# Altium PCB KUOZHAN.PCBDOC (part 6 of 21)
Units mm, origin at the board's own origin, x right, y up, seen from the top; angles counter-clockwise.
Board outline 165.51 x 116.38 mm, 2 copper layers (Top Layer, Bottom Layer); 171 components, 245 nets, 894 pads, 298 vias.
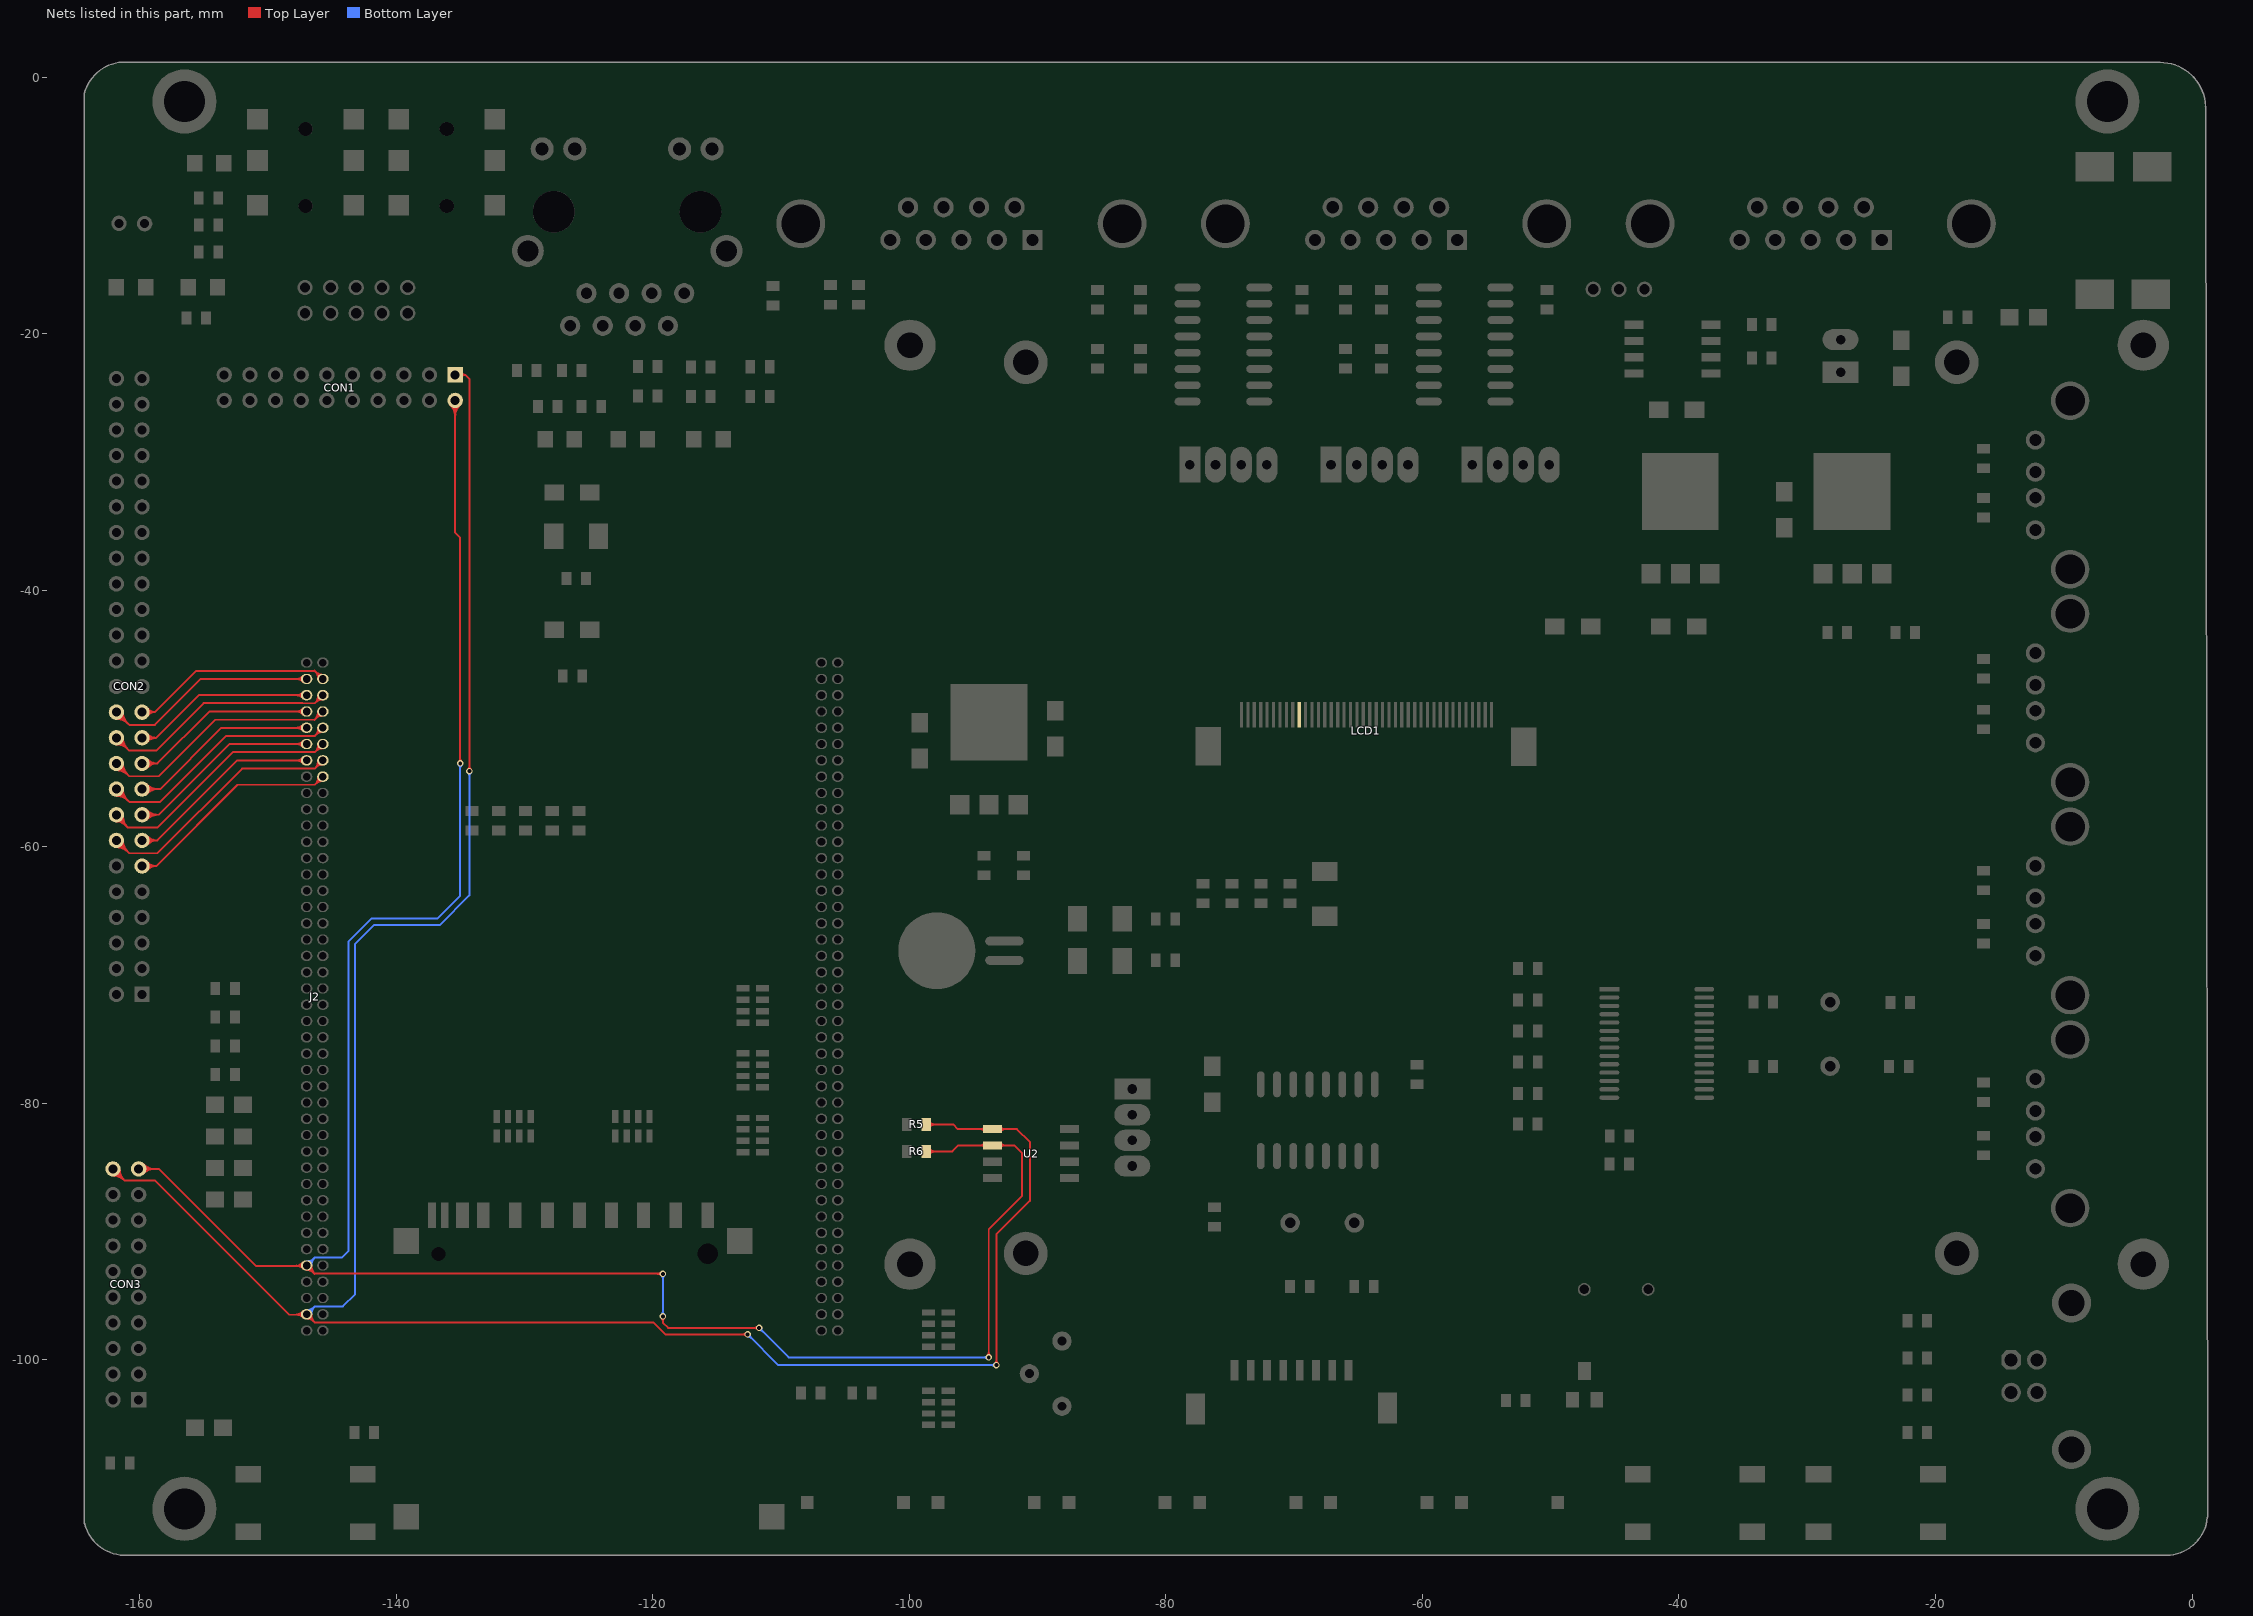
[diagram p6: the nets of this part, all layers, seen from the top]

## Via types
v1: diameter 0.5, hole 0.3, Top Layer to Bottom Layer, 272 vias
v2: diameter 0.6, hole 0.3, Top Layer to Bottom Layer, 24 vias
v3: diameter 0.9, hole 0.9, Top Layer to Bottom Layer, 2 vias

## Nets (pads, with @x,y where several pads share a name; then routed paths per layer and width w, separated by ;. In a path a pad name is that pad's centre, name@x,y a point inside that pad or via, vN(x,y) a via of type N, cw(c..) or ccw(c..) an arc to the next point about the centre after c; other vN are vias at no path point) (continued)
I2CSCL: CON1.2 CON3.19 J2.75 R6.2 U2.6 | length 291.6
  Top Layer w0.15: CON3.19@-160.067,-85.106 -158.494,-85.106 -150.939,-92.661 -146.973,-92.661 -146.348,-93.286 ; J2.75@-146.973,-92.629 -146.328,-93.274 -119.212,-93.274 v1(-119.2,-93.286) ; CON1.2@-135.394,-25.203 -135.394,-35.506 -135,-35.9 v1(-135,-53.5) ; v1@-135.088,-53.412 ccw(c-135.302,-53.198) -135,-53.198 ccw(c-134.698,-53.198) v1@-134.912,-53.412 ; v1@-119.288,-96.688 cw(c-119.502,-96.902) -119.2,-96.902 cw(c-118.898,-96.902) v1@-119.112,-96.688 ; v1@-119.288,-93.374 ccw(c-119.502,-93.588) -119.502,-93.286 ccw(c-119.502,-92.984) v1@-119.288,-93.198 ; v1(-119.2,-96.6) -119.2,-97.1 -118.8,-97.5 v1(-111.7,-97.5) ; v1@-111.788,-97.588 ccw(c-112.002,-97.802) -112.002,-97.5 ccw(c-112.002,-97.198) v1@-111.788,-97.412 ; R6.2@-98.663,-83.74 -96.64,-83.74 -96.172,-83.272 U2.6@-93.498,-83.272 -91.828,-83.272 -91.2,-83.9 -91.2,-87.194 -93.8,-89.794 v1(-93.8,-99.8) ; v1@-93.888,-99.712 ccw(c-94.102,-99.498) -93.8,-99.498 ccw(c-93.498,-99.498) v1@-93.712,-99.712 ; CON3.19@-159.802,-85.372 cw(c-159.162,-86.012) -159.162,-85.106 ; CON3.19@-159.802,-85.372 cw(c-159.162,-86.012) -159.162,-85.106 ; CON3.19@-159.802,-85.372 cw(c-159.162,-86.012) -159.162,-85.106 ; CON3.19@-159.802,-85.372 cw(c-159.162,-86.012) -159.162,-85.106 ; CON3.19@-159.802,-85.372 cw(c-159.162,-86.012) -159.162,-85.106 ; CON3.19@-159.802,-84.841 ccw(c-159.162,-84.201) -159.162,-85.106 ; CON3.19@-159.802,-84.841 ccw(c-159.162,-84.201) -159.162,-85.106 ; CON3.19@-159.802,-84.841 ccw(c-159.162,-84.201) -159.162,-85.106 ; CON3.19@-159.802,-84.841 ccw(c-159.162,-84.201) -159.162,-85.106 ; CON3.19@-159.802,-84.841 ccw(c-159.162,-84.201) -159.162,-85.106 ; CON3.19@-159.696,-85.478 cw(c-158.8,-86.374) -158.8,-85.106 ; CON3.19@-159.696,-85.478 cw(c-158.8,-86.374) -158.8,-85.106 ; CON3.19@-159.696,-85.478 cw(c-158.8,-86.374) -158.8,-85.106 ; CON3.19@-159.696,-85.478 cw(c-158.8,-86.374) -158.8,-85.106 ; CON3.19@-159.696,-85.478 cw(c-158.8,-86.374) -158.8,-85.106 ; CON3.19@-159.696,-84.735 ccw(c-158.8,-83.839) -158.8,-85.106 ; CON3.19@-159.696,-84.735 ccw(c-158.8,-83.839) -158.8,-85.106 ; CON3.19@-159.696,-84.735 ccw(c-158.8,-83.839) -158.8,-85.106 ; CON3.19@-159.696,-84.735 ccw(c-158.8,-83.839) -158.8,-85.106 ; CON3.19@-159.696,-84.735 ccw(c-158.8,-83.839) -158.8,-85.106 ; -147.757,-92.661 cw(c-147.757,-93.446) J2.75@-147.203,-92.891 ; -147.757,-92.661 ccw(c-147.757,-91.876) J2.75@-147.203,-92.431 ; -147.757,-92.661 cw(c-147.757,-93.446) J2.75@-147.203,-92.891 ; -147.757,-92.661 ccw(c-147.757,-91.876) J2.75@-147.203,-92.431 ; -147.757,-92.661 cw(c-147.757,-93.446) J2.75@-147.203,-92.891 ; -147.757,-92.661 ccw(c-147.757,-91.876) J2.75@-147.203,-92.431 ; J2.75@-147.395,-92.661 cw(c-147.395,-93.083) J2.75@-147.097,-92.785 ; J2.75@-147.395,-92.661 ccw(c-147.395,-92.238) J2.75@-147.097,-92.537 ; J2.75@-147.395,-92.661 cw(c-147.395,-93.083) J2.75@-147.097,-92.785 ; J2.75@-147.395,-92.661 ccw(c-147.395,-92.238) J2.75@-147.097,-92.537 ; J2.75@-147.395,-92.661 cw(c-147.395,-93.083) J2.75@-147.097,-92.785 ; J2.75@-147.395,-92.661 ccw(c-147.395,-92.238) J2.75@-147.097,-92.537 ; J2.75@-146.973,-92.986 cw(c-146.973,-93.771) -146.418,-93.216 ; J2.75@-146.973,-92.986 cw(c-146.973,-93.771) -146.418,-93.216 ; J2.75@-146.973,-92.986 cw(c-146.973,-93.771) -146.418,-93.216 ; J2.75@-146.973,-92.836 cw(c-146.973,-93.258) -146.674,-92.96 ; J2.75@-146.973,-92.836 cw(c-146.973,-93.258) -146.674,-92.96 ; J2.75@-146.973,-92.836 cw(c-146.973,-93.258) -146.674,-92.96 ; J2.75@-146.923,-92.954 cw(c-146.923,-93.618) -146.453,-93.149 ccw(c-146.923,-93.618) J2.75@-146.923,-92.954 ; J2.75@-146.923,-92.954 cw(c-146.923,-93.542) -146.507,-93.126 ccw(c-146.923,-93.542) J2.75@-146.923,-92.954 ; J2.75@-146.798,-92.661 ccw(c-146.375,-92.661) -146.674,-92.96 ; J2.75@-146.798,-92.661 ccw(c-146.375,-92.661) -146.674,-92.96 ; J2.75@-146.798,-92.661 ccw(c-146.375,-92.661) -146.674,-92.96 ; J2.75@-146.648,-92.661 ccw(c-145.863,-92.661) -146.418,-93.216 ; J2.75@-146.648,-92.661 ccw(c-145.863,-92.661) -146.418,-93.216 ; J2.75@-146.648,-92.661 ccw(c-145.863,-92.661) -146.418,-93.216 ; CON1.2@-135.765,-25.574 cw(c-136.661,-26.47) -135.394,-26.47 ; CON1.2@-135.765,-25.574 cw(c-136.661,-26.47) -135.394,-26.47 ; CON1.2@-135.765,-25.574 cw(c-136.661,-26.47) -135.394,-26.47 ; CON1.2@-135.765,-25.574 cw(c-136.661,-26.47) -135.394,-26.47 ; CON1.2@-135.765,-25.574 cw(c-136.661,-26.47) -135.394,-26.47 ; CON1.2@-135.659,-25.468 cw(c-136.299,-26.108) -135.394,-26.108 ; CON1.2@-135.659,-25.468 cw(c-136.299,-26.108) -135.394,-26.108 ; CON1.2@-135.659,-25.468 cw(c-136.299,-26.108) -135.394,-26.108 ; CON1.2@-135.659,-25.468 cw(c-136.299,-26.108) -135.394,-26.108 ; CON1.2@-135.659,-25.468 cw(c-136.299,-26.108) -135.394,-26.108 ; -135.394,-26.47 cw(c-134.126,-26.47) CON1.2@-135.022,-25.574 ; -135.394,-26.47 cw(c-134.126,-26.47) CON1.2@-135.022,-25.574 ; -135.394,-26.47 cw(c-134.126,-26.47) CON1.2@-135.022,-25.574 ; -135.394,-26.47 cw(c-134.126,-26.47) CON1.2@-135.022,-25.574 ; -135.394,-26.47 cw(c-134.126,-26.47) CON1.2@-135.022,-25.574 ; -135.394,-26.108 cw(c-134.488,-26.108) CON1.2@-135.128,-25.468 ; -135.394,-26.108 cw(c-134.488,-26.108) CON1.2@-135.128,-25.468 ; -135.394,-26.108 cw(c-134.488,-26.108) CON1.2@-135.128,-25.468 ; -135.394,-26.108 cw(c-134.488,-26.108) CON1.2@-135.128,-25.468 ; -135.394,-26.108 cw(c-134.488,-26.108) CON1.2@-135.128,-25.468 ; v1@-135.124,-53.376 ccw(c-135.422,-53.078) -135,-53.078 ; v1@-135.124,-53.376 ccw(c-135.422,-53.078) -135,-53.078 ; v1@-135.124,-53.376 ccw(c-135.422,-53.078) -135,-53.078 ; v1@-135.124,-53.376 ccw(c-135.422,-53.078) -135,-53.078 ; -135,-53.078 ccw(c-134.578,-53.078) v1@-134.876,-53.376 ; -135,-53.078 ccw(c-134.578,-53.078) v1@-134.876,-53.376 ; -135,-53.078 ccw(c-134.578,-53.078) v1@-134.876,-53.376 ; -135,-53.078 ccw(c-134.578,-53.078) v1@-134.876,-53.376 ; -119.622,-93.286 cw(c-119.622,-93.708) v1@-119.324,-93.41 ; -119.622,-93.286 ccw(c-119.622,-92.863) v1@-119.324,-93.162 ; -119.622,-93.286 cw(c-119.622,-93.708) v1@-119.324,-93.41 ; -119.622,-93.286 ccw(c-119.622,-92.863) v1@-119.324,-93.162 ; v1@-119.324,-96.724 cw(c-119.622,-97.022) -119.2,-97.022 ; v1@-119.324,-96.724 cw(c-119.622,-97.022) -119.2,-97.022 ; v1@-119.324,-96.724 cw(c-119.622,-97.022) -119.2,-97.022 ; v1@-119.324,-96.724 cw(c-119.622,-97.022) -119.2,-97.022 ; v1@-119.324,-93.41 ccw(c-119.651,-93.736) -119.651,-93.274 cw(c-119.651,-93.736) v1@-119.324,-93.41 ; v1@-119.324,-93.162 cw(c-119.594,-92.891) -119.594,-93.274 ccw(c-119.594,-92.891) v1@-119.324,-93.162 ; -119.2,-97.022 cw(c-118.778,-97.022) v1@-119.076,-96.724 ; -119.2,-97.022 cw(c-118.778,-97.022) v1@-119.076,-96.724 ; -119.2,-97.022 cw(c-118.778,-97.022) v1@-119.076,-96.724 ; -119.2,-97.022 cw(c-118.778,-97.022) v1@-119.076,-96.724 ; -112.122,-97.5 cw(c-112.122,-97.922) v1@-111.824,-97.624 ; -112.122,-97.5 ccw(c-112.122,-97.078) v1@-111.824,-97.376 ; -112.122,-97.5 cw(c-112.122,-97.922) v1@-111.824,-97.624 ; -112.122,-97.5 ccw(c-112.122,-97.078) v1@-111.824,-97.376 ; -112.122,-97.5 cw(c-112.122,-97.922) v1@-111.824,-97.624 ; -112.122,-97.5 ccw(c-112.122,-97.078) v1@-111.824,-97.376 ; -112.122,-97.5 ccw(c-112.122,-97.078) v1@-111.824,-97.376 ; -112.122,-97.5 cw(c-112.122,-97.922) v1@-111.824,-97.624 ; R6.2@-98.447,-83.957 cw(c-97.925,-84.479) -97.925,-83.74 ; R6.2@-98.447,-83.957 cw(c-97.925,-84.479) -97.925,-83.74 ; R6.2@-98.447,-83.957 cw(c-97.925,-84.479) -97.925,-83.74 ; R6.2@-98.447,-83.957 cw(c-97.925,-84.479) -97.925,-83.74 ; R6.2@-98.447,-83.957 cw(c-97.925,-84.479) -97.925,-83.74 ; R6.2@-98.447,-83.524 ccw(c-97.925,-83.002) -97.925,-83.74 ; R6.2@-98.447,-83.524 ccw(c-97.925,-83.002) -97.925,-83.74 ; R6.2@-98.447,-83.524 ccw(c-97.925,-83.002) -97.925,-83.74 ; R6.2@-98.447,-83.524 ccw(c-97.925,-83.002) -97.925,-83.74 ; R6.2@-98.447,-83.524 ccw(c-97.925,-83.002) -97.925,-83.74 ; -94.516,-83.272 cw(c-94.516,-83.857) U2.6@-94.102,-83.443 ; -94.516,-83.272 ccw(c-94.516,-82.686) U2.6@-94.102,-83.1 ; -94.516,-83.272 cw(c-94.516,-83.857) U2.6@-94.102,-83.443 ; -94.516,-83.272 ccw(c-94.516,-82.686) U2.6@-94.102,-83.1 ; -94.516,-83.272 cw(c-94.516,-83.857) U2.6@-94.102,-83.443 ; -94.516,-83.272 ccw(c-94.516,-82.686) U2.6@-94.102,-83.1 ; -94.516,-83.272 cw(c-94.516,-83.857) U2.6@-94.102,-83.443 ; -94.516,-83.272 ccw(c-94.516,-82.686) U2.6@-94.102,-83.1 ; -94.516,-83.272 ccw(c-94.516,-82.686) U2.6@-94.102,-83.1 ; -94.516,-83.272 cw(c-94.516,-83.857) U2.6@-94.102,-83.443 ; v1@-93.924,-99.676 ccw(c-94.222,-99.378) -93.8,-99.378 ; v1@-93.924,-99.676 ccw(c-94.222,-99.378) -93.8,-99.378 ; v1@-93.924,-99.676 ccw(c-94.222,-99.378) -93.8,-99.378 ; v1@-93.924,-99.676 ccw(c-94.222,-99.378) -93.8,-99.378 ; -93.8,-99.378 ccw(c-93.378,-99.378) v1@-93.676,-99.676 ; -93.8,-99.378 ccw(c-93.378,-99.378) v1@-93.676,-99.676 ; -93.8,-99.378 ccw(c-93.378,-99.378) v1@-93.676,-99.676 ; -93.8,-99.378 ccw(c-93.378,-99.378) v1@-93.676,-99.676 ; U2.6@-92.894,-83.443 cw(c-92.48,-83.857) -92.48,-83.272 ; U2.6@-92.894,-83.443 cw(c-92.48,-83.857) -92.48,-83.272 ; U2.6@-92.894,-83.443 cw(c-92.48,-83.857) -92.48,-83.272 ; U2.6@-92.894,-83.443 cw(c-92.48,-83.857) -92.48,-83.272 ; U2.6@-92.894,-83.443 cw(c-92.48,-83.857) -92.48,-83.272 ; U2.6@-92.894,-83.1 ccw(c-92.48,-82.686) -92.48,-83.272 ; U2.6@-92.894,-83.1 ccw(c-92.48,-82.686) -92.48,-83.272 ; U2.6@-92.894,-83.1 ccw(c-92.48,-82.686) -92.48,-83.272 ; U2.6@-92.894,-83.1 ccw(c-92.48,-82.686) -92.48,-83.272 ; U2.6@-92.894,-83.1 ccw(c-92.48,-82.686) -92.48,-83.272 ; -147.884,-92.661 ccw(c-147.884,-91.768) -147.253,-92.399 cw(c-147.884,-91.768) -147.884,-92.661 ; -147.731,-92.661 cw(c-147.731,-93.338) -147.253,-92.859 ccw(c-147.731,-93.338) -147.731,-92.661 ; -147.522,-92.661 ccw(c-147.522,-92.131) -147.147,-92.506 cw(c-147.522,-92.131) -147.522,-92.661 ; J2.75@-146.749,-92.646 ccw(c-146.284,-92.69) -146.614,-93.02 cw(c-146.284,-92.69) J2.75@-146.749,-92.646 ; J2.75@-146.748,-92.633 ccw(c-146.244,-92.646) -146.6,-93.002 cw(c-146.244,-92.646) J2.75@-146.748,-92.633 ; J2.75@-146.599,-92.66 ccw(c-145.872,-92.729) -146.389,-93.245 cw(c-145.872,-92.729) J2.75@-146.599,-92.66 ; J2.75@-146.598,-92.637 ccw(c-145.761,-92.657) -146.353,-93.249 cw(c-145.761,-92.657) J2.75@-146.598,-92.637
  Bottom Layer w0.15: J2.75@-146.973,-92.661 -146.327,-92.015 ; J2.75@-146.973,-92.629 -146.343,-92 ; v1@-135.088,-53.588 cw(c-135.302,-53.802) -135,-53.802 cw(c-134.698,-53.802) v1@-134.912,-53.588 ; v1(-135,-53.5) -135,-63.8 -136.8,-65.6 -141.935,-65.6 -143.7,-67.365 -143.7,-91.5 -144.105,-91.905 -144.2,-92 -146.343,-92 ; v1@-119.288,-96.512 ccw(c-119.502,-96.298) -119.2,-96.298 ccw(c-118.898,-96.298) v1@-119.112,-96.512 ; v1@-119.288,-93.374 cw(c-119.502,-93.588) -119.2,-93.588 cw(c-118.898,-93.588) v1@-119.112,-93.374 ; v1(-119.2,-96.6) v1(-119.2,-93.286) ; v1@-111.7,-97.625 cw(c-111.7,-97.927) -111.487,-97.713 cw(c-111.273,-97.5) v1@-111.575,-97.5 ; v1(-111.7,-97.5) -109.4,-99.8 v1(-93.8,-99.8) ; v1@-93.888,-99.888 ccw(c-94.102,-100.102) -94.102,-99.8 ccw(c-94.102,-99.498) v1@-93.888,-99.712 ; J2.75@-146.973,-92.486 ccw(c-146.973,-92.063) J2.75@-146.674,-92.362 ; J2.75@-146.973,-92.486 ccw(c-146.973,-92.063) J2.75@-146.674,-92.362 ; J2.75@-146.973,-92.486 ccw(c-146.973,-92.063) J2.75@-146.674,-92.362 ; J2.75@-146.973,-92.336 ccw(c-146.973,-91.551) -146.418,-92.106 ; J2.75@-146.973,-92.336 ccw(c-146.973,-91.551) -146.418,-92.106 ; J2.75@-146.973,-92.336 ccw(c-146.973,-91.551) -146.418,-92.106 ; J2.75@-146.923,-92.304 ccw(c-146.923,-91.564) -146.399,-92.087 cw(c-146.923,-91.564) J2.75@-146.923,-92.304 ; J2.75@-146.923,-92.304 ccw(c-146.923,-91.64) -146.453,-92.11 cw(c-146.923,-91.64) J2.75@-146.923,-92.304 ; J2.75@-146.798,-92.661 cw(c-146.375,-92.661) J2.75@-146.674,-92.362 ; J2.75@-146.798,-92.661 cw(c-146.375,-92.661) J2.75@-146.674,-92.362 ; J2.75@-146.798,-92.661 cw(c-146.375,-92.661) J2.75@-146.674,-92.362 ; J2.75@-146.648,-92.661 cw(c-145.863,-92.661) -146.418,-92.106 ; J2.75@-146.648,-92.661 cw(c-145.863,-92.661) -146.418,-92.106 ; J2.75@-146.648,-92.661 cw(c-145.863,-92.661) -146.418,-92.106 ; -146.344,-92 ccw(c-145.729,-92.614) -146.598,-92.625 cw(c-145.729,-92.614) -146.344,-92 ; v1@-135.124,-53.624 cw(c-135.422,-53.922) -135,-53.922 ; v1@-135.124,-53.624 cw(c-135.422,-53.922) -135,-53.922 ; v1@-135.124,-53.624 cw(c-135.422,-53.922) -135,-53.922 ; v1@-135.124,-53.624 cw(c-135.422,-53.922) -135,-53.922 ; -135,-53.922 cw(c-134.578,-53.922) v1@-134.876,-53.624 ; -135,-53.922 cw(c-134.578,-53.922) v1@-134.876,-53.624 ; -135,-53.922 cw(c-134.578,-53.922) v1@-134.876,-53.624 ; -135,-53.922 cw(c-134.578,-53.922) v1@-134.876,-53.624 ; v1@-119.324,-96.476 ccw(c-119.622,-96.178) -119.2,-96.178 ; v1@-119.324,-96.476 ccw(c-119.622,-96.178) -119.2,-96.178 ; v1@-119.324,-96.476 ccw(c-119.622,-96.178) -119.2,-96.178 ; v1@-119.324,-96.476 ccw(c-119.622,-96.178) -119.2,-96.178 ; v1@-119.324,-93.41 cw(c-119.622,-93.708) -119.2,-93.708 ; v1@-119.324,-93.41 cw(c-119.622,-93.708) -119.2,-93.708 ; v1@-119.324,-93.41 cw(c-119.622,-93.708) -119.2,-93.708 ; v1@-119.324,-93.41 cw(c-119.622,-93.708) -119.2,-93.708 ; -119.2,-96.178 ccw(c-118.778,-96.178) v1@-119.076,-96.476 ; -119.2,-96.178 ccw(c-118.778,-96.178) v1@-119.076,-96.476 ; -119.2,-96.178 ccw(c-118.778,-96.178) v1@-119.076,-96.476 ; -119.2,-96.178 ccw(c-118.778,-96.178) v1@-119.076,-96.476 ; -119.2,-93.708 cw(c-118.778,-93.708) v1@-119.076,-93.41 ; -119.2,-93.708 cw(c-118.778,-93.708) v1@-119.076,-93.41 ; -119.2,-93.708 cw(c-118.778,-93.708) v1@-119.076,-93.41 ; -119.2,-93.708 cw(c-118.778,-93.708) v1@-119.076,-93.41 ; v1@-111.7,-97.675 cw(c-111.7,-98.097) -111.401,-97.799 ; v1@-111.7,-97.675 cw(c-111.7,-98.097) -111.401,-97.799 ; v1@-111.7,-97.675 cw(c-111.7,-98.097) -111.401,-97.799 ; v1@-111.7,-97.675 cw(c-111.7,-98.097) -111.401,-97.799 ; v1@-111.525,-97.5 ccw(c-111.103,-97.5) -111.401,-97.799 ; v1@-111.525,-97.5 ccw(c-111.103,-97.5) -111.401,-97.799 ; v1@-111.525,-97.5 ccw(c-111.103,-97.5) -111.401,-97.799 ; v1@-111.525,-97.5 ccw(c-111.103,-97.5) -111.401,-97.799 ; -94.222,-99.8 cw(c-94.222,-100.222) v1@-93.924,-99.924 ; -94.222,-99.8 ccw(c-94.222,-99.378) v1@-93.924,-99.676 ; -94.222,-99.8 cw(c-94.222,-100.222) v1@-93.924,-99.924 ; -94.222,-99.8 ccw(c-94.222,-99.378) v1@-93.924,-99.676 ; -94.222,-99.8 cw(c-94.222,-100.222) v1@-93.924,-99.924 ; -94.222,-99.8 ccw(c-94.222,-99.378) v1@-93.924,-99.676 ; -94.222,-99.8 ccw(c-94.222,-99.378) v1@-93.924,-99.676 ; -94.222,-99.8 cw(c-94.222,-100.222) v1@-93.924,-99.924 ; J2.75@-146.748,-92.629 cw(c-146.281,-92.629) -146.611,-92.299 ccw(c-146.281,-92.629) J2.75@-146.748,-92.629 ; J2.75@-146.748,-92.627 cw(c-146.226,-92.62) -146.595,-92.252 ccw(c-146.226,-92.62) J2.75@-146.748,-92.627 ; J2.75@-146.598,-92.629 cw(c-145.769,-92.629) -146.355,-92.043 ccw(c-145.769,-92.629) J2.75@-146.598,-92.629
I2CSDA: CON1.1 CON3.20 J2.81 R5.2 U2.5 | length 267.9
  Top Layer w0.15: CON3.20@-162.067,-85.106 -161.174,-86 ; J2.81@-146.973,-96.474 -148.326,-96.474 -158.8,-86 -161.174,-86 ; J2.81@-146.973,-96.439 -146.348,-97.064 -119.936,-97.064 ; CON1.1@-135.394,-23.203 -134.597,-23.203 ; v1@-134.368,-54.012 ccw(c-134.581,-53.798) -134.279,-53.798 ccw(c-133.977,-53.798) v1@-134.191,-54.012 ; v1(-134.279,-54.1) -134.279,-23.521 -134.597,-23.203 ; -119.901,-97.099 -119,-98 v1(-112.6,-98) ; v1@-112.688,-98.088 ccw(c-112.902,-98.302) -112.902,-98 ccw(c-112.902,-97.698) v1@-112.688,-97.912 ; R5.2@-98.663,-81.64 -96.56,-81.64 -96.198,-82.002 U2.5@-93.498,-82.002 -91.598,-82.002 -90.6,-83 -90.6,-87.6 -93.2,-90.2 v1(-93.2,-100.4) ; v1@-93.288,-100.312 ccw(c-93.502,-100.098) -93.2,-100.098 ccw(c-92.898,-100.098) v1@-93.112,-100.312 ; CON3.20@-162.066,-85.631 cw(c-162.064,-86.89) -161.174,-86 ; CON3.20@-162.066,-85.631 cw(c-162.064,-86.89) -161.174,-86 ; CON3.20@-162.066,-85.631 cw(c-162.064,-86.89) -161.174,-86 ; CON3.20@-162.066,-85.631 cw(c-162.064,-86.89) -161.174,-86 ; CON3.20@-162.066,-85.631 cw(c-162.064,-86.89) -161.174,-86 ; CON3.20@-162.067,-85.481 cw(c-162.065,-86.38) -161.429,-85.745 ; CON3.20@-162.067,-85.481 cw(c-162.065,-86.38) -161.429,-85.745 ; CON3.20@-162.067,-85.481 cw(c-162.065,-86.38) -161.429,-85.745 ; CON3.20@-162.067,-85.481 cw(c-162.065,-86.38) -161.429,-85.745 ; CON3.20@-162.067,-85.481 cw(c-162.065,-86.38) -161.429,-85.745 ; CON3.20@-161.692,-85.107 ccw(c-160.794,-85.109) -161.429,-85.745 ; CON3.20@-161.692,-85.107 ccw(c-160.794,-85.109) -161.429,-85.745 ; CON3.20@-161.692,-85.107 ccw(c-160.794,-85.109) -161.429,-85.745 ; CON3.20@-161.692,-85.107 ccw(c-160.794,-85.109) -161.429,-85.745 ; CON3.20@-161.692,-85.107 ccw(c-160.794,-85.109) -161.429,-85.745 ; CON3.20@-161.542,-85.108 ccw(c-160.284,-85.11) -161.174,-86 ; CON3.20@-161.542,-85.108 ccw(c-160.284,-85.11) -161.174,-86 ; CON3.20@-161.542,-85.108 ccw(c-160.284,-85.11) -161.174,-86 ; CON3.20@-161.542,-85.108 ccw(c-160.284,-85.11) -161.174,-86 ; CON3.20@-161.542,-85.108 ccw(c-160.284,-85.11) -161.174,-86 ; -147.757,-96.474 cw(c-147.757,-97.258) J2.81@-147.203,-96.703 ; -147.757,-96.474 ccw(c-147.757,-95.689) J2.81@-147.203,-96.244 ; -147.757,-96.474 cw(c-147.757,-97.258) J2.81@-147.203,-96.703 ; -147.757,-96.474 ccw(c-147.757,-95.689) J2.81@-147.203,-96.244 ; -147.757,-96.474 cw(c-147.757,-97.258) J2.81@-147.203,-96.703 ; -147.757,-96.474 ccw(c-147.757,-95.689) J2.81@-147.203,-96.244 ; J2.81@-147.395,-96.474 cw(c-147.395,-96.896) J2.81@-147.097,-96.597 ; J2.81@-147.395,-96.474 ccw(c-147.395,-96.051) J2.81@-147.097,-96.35 ; J2.81@-147.395,-96.474 cw(c-147.395,-96.896) J2.81@-147.097,-96.597 ; J2.81@-147.395,-96.474 ccw(c-147.395,-96.051) J2.81@-147.097,-96.35 ; J2.81@-147.395,-96.474 cw(c-147.395,-96.896) J2.81@-147.097,-96.597 ; J2.81@-147.395,-96.474 ccw(c-147.395,-96.051) J2.81@-147.097,-96.35 ; J2.81@-146.973,-96.649 cw(c-146.973,-97.071) -146.674,-96.772 ; J2.81@-146.973,-96.649 cw(c-146.973,-97.071) -146.674,-96.772 ; J2.81@-146.973,-96.649 cw(c-146.973,-97.071) -146.674,-96.772 ; J2.81@-146.798,-96.474 ccw(c-146.375,-96.474) -146.674,-96.772 ; J2.81@-146.798,-96.474 ccw(c-146.375,-96.474) -146.674,-96.772 ; J2.81@-146.798,-96.474 ccw(c-146.375,-96.474) -146.674,-96.772 ; CON1.1@-134.911,-23.409 cw(c-134.597,-23.544) -134.597,-23.203 ; CON1.1@-134.911,-23.409 cw(c-134.597,-23.544) -134.597,-23.203 ; CON1.1@-134.911,-23.409 cw(c-134.597,-23.544) -134.597,-23.203 ; CON1.1@-134.911,-23.409 cw(c-134.597,-23.544) -134.597,-23.203 ; CON1.1@-134.911,-23.409 cw(c-134.597,-23.544) -134.597,-23.203 ; CON1.1@-134.911,-22.996 ccw(c-134.597,-22.861) -134.597,-23.203 ; CON1.1@-134.911,-22.996 ccw(c-134.597,-22.861) -134.597,-23.203 ; CON1.1@-134.911,-22.996 ccw(c-134.597,-22.861) -134.597,-23.203 ; CON1.1@-134.911,-22.996 ccw(c-134.597,-22.861) -134.597,-23.203 ; CON1.1@-134.911,-22.996 ccw(c-134.597,-22.861) -134.597,-23.203 ; v1@-134.403,-53.976 ccw(c-134.702,-53.678) -134.279,-53.678 ; v1@-134.403,-53.976 ccw(c-134.702,-53.678) -134.279,-53.678 ; v1@-134.403,-53.976 ccw(c-134.702,-53.678) -134.279,-53.678 ; v1@-134.403,-53.976 ccw(c-134.702,-53.678) -134.279,-53.678 ; -134.279,-53.678 ccw(c-133.857,-53.678) v1@-134.155,-53.976 ; -134.279,-53.678 ccw(c-133.857,-53.678) v1@-134.155,-53.976 ; -134.279,-53.678 ccw(c-133.857,-53.678) v1@-134.155,-53.976 ; -134.279,-53.678 ccw(c-133.857,-53.678) v1@-134.155,-53.976 ; -113.022,-98 cw(c-113.022,-98.422) v1@-112.724,-98.124 ; -113.022,-98 ccw(c-113.022,-97.578) v1@-112.724,-97.876 ; -113.022,-98 cw(c-113.022,-98.422) v1@-112.724,-98.124 ; -113.022,-98 ccw(c-113.022,-97.578) v1@-112.724,-97.876 ; -113.022,-98 cw(c-113.022,-98.422) v1@-112.724,-98.124 ; -113.022,-98 ccw(c-113.022,-97.578) v1@-112.724,-97.876 ; -113.022,-98 ccw(c-113.022,-97.578) v1@-112.724,-97.876 ; -113.022,-98 cw(c-113.022,-98.422) v1@-112.724,-98.124 ; R5.2@-98.447,-81.857 cw(c-97.925,-82.379) -97.925,-81.64 ; R5.2@-98.447,-81.857 cw(c-97.925,-82.379) -97.925,-81.64 ; R5.2@-98.447,-81.857 cw(c-97.925,-82.379) -97.925,-81.64 ; R5.2@-98.447,-81.857 cw(c-97.925,-82.379) -97.925,-81.64 ; R5.2@-98.447,-81.857 cw(c-97.925,-82.379) -97.925,-81.64 ; R5.2@-98.447,-81.424 ccw(c-97.925,-80.902) -97.925,-81.64 ; R5.2@-98.447,-81.424 ccw(c-97.925,-80.902) -97.925,-81.64 ; R5.2@-98.447,-81.424 ccw(c-97.925,-80.902) -97.925,-81.64 ; R5.2@-98.447,-81.424 ccw(c-97.925,-80.902) -97.925,-81.64 ; R5.2@-98.447,-81.424 ccw(c-97.925,-80.902) -97.925,-81.64 ; -94.516,-82.002 cw(c-94.516,-82.587) U2.5@-94.102,-82.173 ; -94.516,-82.002 ccw(c-94.516,-81.416) U2.5@-94.102,-81.83 ; -94.516,-82.002 cw(c-94.516,-82.587) U2.5@-94.102,-82.173 ; -94.516,-82.002 ccw(c-94.516,-81.416) U2.5@-94.102,-81.83 ; -94.516,-82.002 cw(c-94.516,-82.587) U2.5@-94.102,-82.173 ; -94.516,-82.002 ccw(c-94.516,-81.416) U2.5@-94.102,-81.83 ; -94.516,-82.002 cw(c-94.516,-82.587) U2.5@-94.102,-82.173 ; -94.516,-82.002 ccw(c-94.516,-81.416) U2.5@-94.102,-81.83 ; -94.516,-82.002 ccw(c-94.516,-81.416) U2.5@-94.102,-81.83 ; -94.516,-82.002 cw(c-94.516,-82.587) U2.5@-94.102,-82.173 ; v1@-93.324,-100.276 ccw(c-93.622,-99.978) -93.2,-99.978 ; v1@-93.324,-100.276 ccw(c-93.622,-99.978) -93.2,-99.978 ; v1@-93.324,-100.276 ccw(c-93.622,-99.978) -93.2,-99.978 ; v1@-93.324,-100.276 ccw(c-93.622,-99.978) -93.2,-99.978 ; -93.2,-99.978 ccw(c-92.778,-99.978) v1@-93.076,-100.276 ; -93.2,-99.978 ccw(c-92.778,-99.978) v1@-93.076,-100.276 ; -93.2,-99.978 ccw(c-92.778,-99.978) v1@-93.076,-100.276 ; -93.2,-99.978 ccw(c-92.778,-99.978) v1@-93.076,-100.276 ; U2.5@-92.894,-82.173 cw(c-92.48,-82.587) -92.48,-82.002 ; U2.5@-92.894,-82.173 cw(c-92.48,-82.587) -92.48,-82.002 ; U2.5@-92.894,-82.173 cw(c-92.48,-82.587) -92.48,-82.002 ; U2.5@-92.894,-82.173 cw(c-92.48,-82.587) -92.48,-82.002 ; U2.5@-92.894,-82.173 cw(c-92.48,-82.587) -92.48,-82.002 ; U2.5@-92.894,-81.83 ccw(c-92.48,-81.416) -92.48,-82.002 ; U2.5@-92.894,-81.83 ccw(c-92.48,-81.416) -92.48,-82.002 ; U2.5@-92.894,-81.83 ccw(c-92.48,-81.416) -92.48,-82.002 ; U2.5@-92.894,-81.83 ccw(c-92.48,-81.416) -92.48,-82.002 ; U2.5@-92.894,-81.83 ccw(c-92.48,-81.416) -92.48,-82.002 ; -147.89,-96.474 ccw(c-147.89,-95.572) -147.253,-96.209 cw(c-147.89,-95.572) -147.89,-96.474 ; -147.725,-96.474 cw(c-147.725,-97.141) -147.253,-96.669 ccw(c-147.725,-97.141) -147.725,-96.474 ; -147.528,-96.474 ccw(c-147.528,-95.934) -147.147,-96.316 cw(c-147.528,-95.934) -147.528,-96.474 ; J2.81@-146.923,-96.764 cw(c-146.923,-97.428) -146.453,-96.959 ccw(c-146.923,-97.428) J2.81@-146.923,-96.764 ; J2.81@-146.748,-96.448 ccw(c-146.283,-96.471) -146.612,-96.8 cw(c-146.283,-96.471) J2.81@-146.748,-96.448 ; J2.81@-146.598,-96.455 ccw(c-145.827,-96.493) -146.373,-97.039 cw(c-145.827,-96.493) J2.81@-146.598,-96.455
  Bottom Layer w0.15: J2.81@-146.973,-96.474 -146.327,-95.828 ; J2.81@-146.973,-96.439 -146.348,-95.814 ; v1@-134.368,-54.188 cw(c-134.581,-54.402) -134.279,-54.402 cw(c-133.977,-54.402) v1@-134.191,-54.188 ; v1(-134.279,-54.1) -134.279,-63.779 -136.6,-66.1 -141.728,-66.1 -143.2,-67.572 -143.2,-94.878 -144.137,-95.814 -146.348,-95.814 ; v1@-112.6,-98.125 cw(c-112.6,-98.427) -112.387,-98.213 cw(c-112.173,-98) v1@-112.475,-98 ; v1(-112.6,-98) -110.2,-100.4 v1(-93.2,-100.4) ; v1@-93.288,-100.488 ccw(c-93.502,-100.702) -93.502,-100.4 ccw(c-93.502,-100.098) v1@-93.288,-100.312 ; J2.81@-146.973,-96.299 ccw(c-146.973,-95.876) J2.81@-146.674,-96.175 ; J2.81@-146.973,-96.299 ccw(c-146.973,-95.876) J2.81@-146.674,-96.175 ; J2.81@-146.973,-96.299 ccw(c-146.973,-95.876) J2.81@-146.674,-96.175 ; J2.81@-146.973,-96.149 ccw(c-146.973,-95.364) -146.418,-95.919 ; J2.81@-146.973,-96.149 ccw(c-146.973,-95.364) -146.418,-95.919 ; J2.81@-146.973,-96.149 ccw(c-146.973,-95.364) -146.418,-95.919 ; J2.81@-146.923,-96.114 ccw(c-146.923,-95.368) -146.395,-95.896 cw(c-146.923,-95.368) J2.81@-146.923,-96.114 ; J2.81@-146.923,-96.114 ccw(c-146.923,-95.45) -146.453,-95.92 cw(c-146.923,-95.45) J2.81@-146.923,-96.114 ; J2.81@-146.798,-96.474 cw(c-146.375,-96.474) J2.81@-146.674,-96.175 ; J2.81@-146.798,-96.474 cw(c-146.375,-96.474) J2.81@-146.674,-96.175 ; J2.81@-146.798,-96.474 cw(c-146.375,-96.474) J2.81@-146.674,-96.175 ; J2.81@-146.648,-96.474 cw(c-145.863,-96.474) -146.418,-95.919 ; J2.81@-146.648,-96.474 cw(c-145.863,-96.474) -146.418,-95.919 ; J2.81@-146.648,-96.474 cw(c-145.863,-96.474) -146.418,-95.919 ; -146.348,-95.814 ccw(c-145.744,-96.418) -146.598,-96.433 cw(c-145.744,-96.418) -146.348,-95.814 ; v1@-134.403,-54.224 cw(c-134.702,-54.522) -134.279,-54.522 ; v1@-134.403,-54.224 cw(c-134.702,-54.522) -134.279,-54.522 ; v1@-134.403,-54.224 cw(c-134.702,-54.522) -134.279,-54.522 ; v1@-134.403,-54.224 cw(c-134.702,-54.522) -134.279,-54.522 ; -134.279,-54.522 cw(c-133.857,-54.522) v1@-134.155,-54.224 ; -134.279,-54.522 cw(c-133.857,-54.522) v1@-134.155,-54.224 ; -134.279,-54.522 cw(c-133.857,-54.522) v1@-134.155,-54.224 ; -134.279,-54.522 cw(c-133.857,-54.522) v1@-134.155,-54.224 ; v1@-112.6,-98.175 cw(c-112.6,-98.597) -112.301,-98.299 ; v1@-112.6,-98.175 cw(c-112.6,-98.597) -112.301,-98.299 ; v1@-112.6,-98.175 cw(c-112.6,-98.597) -112.301,-98.299 ; v1@-112.6,-98.175 cw(c-112.6,-98.597) -112.301,-98.299 ; v1@-112.425,-98 ccw(c-112.003,-98) -112.301,-98.299 ; v1@-112.425,-98 ccw(c-112.003,-98) -112.301,-98.299 ; v1@-112.425,-98 ccw(c-112.003,-98) -112.301,-98.299 ; v1@-112.425,-98 ccw(c-112.003,-98) -112.301,-98.299 ; -93.622,-100.4 cw(c-93.622,-100.822) v1@-93.324,-100.524 ; -93.622,-100.4 ccw(c-93.622,-99.978) v1@-93.324,-100.276 ; -93.622,-100.4 cw(c-93.622,-100.822) v1@-93.324,-100.524 ; -93.622,-100.4 ccw(c-93.622,-99.978) v1@-93.324,-100.276 ; -93.622,-100.4 cw(c-93.622,-100.822) v1@-93.324,-100.524 ; -93.622,-100.4 ccw(c-93.622,-99.978) v1@-93.324,-100.276 ; -93.622,-100.4 ccw(c-93.622,-99.978) v1@-93.324,-100.276 ; -93.622,-100.4 cw(c-93.622,-100.822) v1@-93.324,-100.524 ; J2.81@-146.748,-96.439 cw(c-146.287,-96.439) -146.613,-96.114 ccw(c-146.287,-96.439) J2.81@-146.748,-96.439 ; J2.81@-146.748,-96.436 cw(c-146.235,-96.427) -146.598,-96.064 ccw(c-146.235,-96.427) J2.81@-146.748,-96.436 ; J2.81@-146.598,-96.439 cw(c-145.775,-96.439) -146.357,-95.858 ccw(c-145.775,-96.439) J2.81@-146.598,-96.439
KEY: LCD1.31
LADDR0: CON2.23 J2.4 | length 27
  Top Layer w0.15: CON2.23@-159.8,-49.5 -158.8,-49.5 ; CON2.23@-159.491,-49.713 cw(c-159.086,-49.993) -159.086,-49.5 cw(c-159.086,-49.007) CON2.23@-159.491,-49.287 ; CON2.23@-159.368,-49.798 cw(c-158.8,-50.19) -158.8,-49.5 ; CON2.23@-159.368,-49.202 ccw(c-158.8,-48.81) -158.8,-49.5 ; J2.4@-145.703,-46.909 -146.33,-46.282 -155.582,-46.282 -158.8,-49.5 ; -146.258,-46.354 cw(c-146.812,-46.909) J2.4@-146.028,-46.909 ; -146.258,-46.354 ccw(c-145.703,-45.8) J2.4@-145.703,-46.584 ; -146.258,-46.354 cw(c-146.812,-46.909) J2.4@-146.028,-46.909 ; -146.258,-46.354 ccw(c-145.703,-45.8) J2.4@-145.703,-46.584 ; -146.258,-46.354 cw(c-146.812,-46.909) J2.4@-146.028,-46.909 ; -146.258,-46.354 ccw(c-145.703,-45.8) J2.4@-145.703,-46.584 ; J2.4@-146.002,-46.611 cw(c-146.3,-46.909) J2.4@-145.878,-46.909 ; J2.4@-146.002,-46.611 ccw(c-145.703,-46.312) J2.4@-145.703,-46.734 ; J2.4@-146.002,-46.611 cw(c-146.3,-46.909) J2.4@-145.878,-46.909 ; J2.4@-146.002,-46.611 ccw(c-145.703,-46.312) J2.4@-145.703,-46.734 ; J2.4@-146.002,-46.611 cw(c-146.3,-46.909) J2.4@-145.878,-46.909 ; J2.4@-146.002,-46.611 ccw(c-145.703,-46.312) J2.4@-145.703,-46.734 ; -146.343,-46.269 cw(c-146.983,-46.909) -146.078,-46.909 ccw(c-146.983,-46.909) -146.343,-46.269 ; -146.222,-46.39 ccw(c-145.753,-45.921) -145.753,-46.584 cw(c-145.753,-45.921) -146.222,-46.39 ; -146.087,-46.525 cw(c-146.471,-46.909) -145.928,-46.909 ccw(c-146.471,-46.909) -146.087,-46.525
LADDR1: CON2.24 J2.3 | length 29.6
  Top Layer w0.15: CON2.24@-161.8,-50.025 cw(c-161.8,-51.292) -160.904,-50.396 cw(c-160.008,-49.5) CON2.24@-161.275,-49.5 ; CON2.24@-161.8,-49.875 cw(c-161.8,-50.78) -161.16,-50.14 cw(c-160.52,-49.5) CON2.24@-161.425,-49.5 ; CON2.24@-161.8,-49.5 -160.8,-50.5 -158.8,-50.5 -155.209,-46.909 J2.3@-146.973,-46.909 ; -147.757,-46.909 cw(c-147.757,-47.694) J2.3@-147.203,-47.139 ; -147.757,-46.909 ccw(c-147.757,-46.125) J2.3@-147.203,-46.679 ; -147.757,-46.909 cw(c-147.757,-47.694) J2.3@-147.203,-47.139 ; -147.757,-46.909 ccw(c-147.757,-46.125) J2.3@-147.203,-46.679 ; -147.757,-46.909 cw(c-147.757,-47.694) J2.3@-147.203,-47.139 ; -147.757,-46.909 ccw(c-147.757,-46.125) J2.3@-147.203,-46.679 ; J2.3@-147.395,-46.909 cw(c-147.395,-47.332) J2.3@-147.097,-47.033 ; J2.3@-147.395,-46.909 ccw(c-147.395,-46.487) J2.3@-147.097,-46.786 ; J2.3@-147.395,-46.909 cw(c-147.395,-47.332) J2.3@-147.097,-47.033 ; J2.3@-147.395,-46.909 ccw(c-147.395,-46.487) J2.3@-147.097,-46.786 ; J2.3@-147.395,-46.909 cw(c-147.395,-47.332) J2.3@-147.097,-47.033 ; J2.3@-147.395,-46.909 ccw(c-147.395,-46.487) J2.3@-147.097,-46.786 ; -147.808,-46.909 cw(c-147.808,-47.694) -147.253,-47.139 ccw(c-147.808,-47.694) -147.808,-46.909 ; -147.807,-46.909 ccw(c-147.807,-46.125) -147.253,-46.68 cw(c-147.807,-46.125) -147.807,-46.909 ; -147.446,-46.909 cw(c-147.446,-47.332) -147.147,-47.033 ccw(c-147.446,-47.332) -147.446,-46.909 ; -147.445,-46.909 ccw(c-147.445,-46.487) -147.147,-46.786 cw(c-147.445,-46.487) -147.445,-46.909
LADDR2: CON2.19 J2.7 | length 27.1
  Top Layer w0.15: CON2.19@-159.8,-53.5 -158.6,-53.5 ; CON2.19@-159.525,-53.754 cw(c-158.943,-54.292) -158.943,-53.5 cw(c-158.943,-52.708) CON2.19@-159.525,-53.245 ; CON2.19@-159.414,-53.856 cw(c-158.6,-54.609) -158.6,-53.5 ; CON2.19@-159.414,-53.144 ccw(c-158.6,-52.391) -158.6,-53.5 ; J2.7@-146.973,-49.449 -154.551,-49.451 -158.6,-53.5 ; -147.757,-49.451 cw(c-147.757,-50.236) J2.7@-147.203,-49.681 ; -147.757,-49.451 ccw(c-147.757,-48.666) J2.7@-147.203,-49.221 ; -147.757,-49.451 cw(c-147.757,-50.236) J2.7@-147.203,-49.681 ; -147.757,-49.451 ccw(c-147.757,-48.666) J2.7@-147.203,-49.221 ; -147.757,-49.451 cw(c-147.757,-50.236) J2.7@-147.203,-49.681 ; -147.757,-49.451 ccw(c-147.757,-48.666) J2.7@-147.203,-49.221 ; J2.7@-147.395,-49.451 cw(c-147.395,-49.874) J2.7@-147.097,-49.575 ; J2.7@-147.395,-49.451 ccw(c-147.395,-49.029) J2.7@-147.097,-49.327 ; J2.7@-147.395,-49.451 cw(c-147.395,-49.874) J2.7@-147.097,-49.575 ; J2.7@-147.395,-49.451 ccw(c-147.395,-49.029) J2.7@-147.097,-49.327 ; J2.7@-147.395,-49.451 cw(c-147.395,-49.874) J2.7@-147.097,-49.575 ; J2.7@-147.395,-49.451 ccw(c-147.395,-49.029) J2.7@-147.097,-49.327 ; -147.811,-49.451 ccw(c-147.811,-48.661) -147.253,-49.22 cw(c-147.811,-48.661) -147.811,-49.451 ; -147.803,-49.451 cw(c-147.803,-50.23) -147.253,-49.679 ccw(c-147.803,-50.23) -147.803,-49.451 ; -147.449,-49.451 ccw(c-147.449,-49.023) -147.147,-49.326 cw(c-147.449,-49.023) -147.449,-49.451 ; -147.441,-49.451 cw(c-147.441,-49.868) -147.147,-49.573 ccw(c-147.441,-49.868) -147.441,-49.451
LADDR3: CON2.20 J2.8 | length 35
  Top Layer w0.15: CON2.20@-161.8,-54.025 cw(c-161.8,-55.292) -160.904,-54.396 cw(c-160.008,-53.5) CON2.20@-161.275,-53.5 ; CON2.20@-161.8,-53.875 cw(c-161.8,-54.78) -161.16,-54.14 cw(c-160.52,-53.5) CON2.20@-161.425,-53.5 ; CON2.20@-161.8,-53.5 -160.8,-54.5 -158.5,-54.5 -154.094,-50.094 -146.348,-50.094 J2.8@-145.703,-49.449 ; -146.349,-50.097 J2.8@-145.703,-49.449 ; -146.258,-50.006 cw(c-145.703,-50.561) J2.8@-145.703,-49.776 ; -146.258,-50.006 ccw(c-146.812,-49.451) J2.8@-146.028,-49.451 ; -146.258,-50.006 cw(c-145.703,-50.561) J2.8@-145.703,-49.776 ; -146.258,-50.006 ccw(c-146.812,-49.451) J2.8@-146.028,-49.451 ; -146.258,-50.006 cw(c-145.703,-50.561) J2.8@-145.703,-49.776 ; -146.258,-50.006 ccw(c-146.812,-49.451) J2.8@-146.028,-49.451 ; J2.8@-146.002,-49.75 cw(c-145.703,-50.049) J2.8@-145.703,-49.626 ; J2.8@-146.002,-49.75 ccw(c-146.3,-49.451) J2.8@-145.878,-49.451 ; J2.8@-146.002,-49.75 cw(c-145.703,-50.049) J2.8@-145.703,-49.626 ; J2.8@-146.002,-49.75 ccw(c-146.3,-49.451) J2.8@-145.878,-49.451 ; J2.8@-146.002,-49.75 cw(c-145.703,-50.049) J2.8@-145.703,-49.626 ; J2.8@-146.002,-49.75 ccw(c-146.3,-49.451) J2.8@-145.878,-49.451 ; J2.8@-145.928,-49.454 cw(c-146.431,-49.466) -146.075,-49.822 ccw(c-146.431,-49.466) J2.8@-145.928,-49.454 ; J2.8@-145.928,-49.454 cw(c-146.433,-49.466) -146.076,-49.824 ccw(c-146.433,-49.466) J2.8@-145.928,-49.454 ; J2.8@-145.753,-49.774 ccw(c-145.753,-50.438) -146.222,-49.969 cw(c-145.753,-50.438) J2.8@-145.753,-49.774 ; J2.8@-145.753,-49.774 ccw(c-145.753,-50.434) -146.219,-49.968 cw(c-145.753,-50.434) J2.8@-145.753,-49.774 ; -146.323,-50.071 ccw(c-146.915,-49.479) -146.078,-49.458 cw(c-146.915,-49.479) -146.323,-50.071 ; -146.323,-50.069 ccw(c-146.915,-49.477) -146.078,-49.457 cw(c-146.915,-49.477) -146.323,-50.069
LADDR4: CON2.21 J2.5 | length 26.4
  Top Layer w0.15: CON2.21@-159.8,-51.5 -158.7,-51.5 ; CON2.21@-159.508,-51.736 cw(c-159.014,-52.136) -159.014,-51.5 cw(c-159.014,-50.864) CON2.21@-159.508,-51.264 ; CON2.21@-159.392,-51.83 cw(c-158.7,-52.39) -158.7,-51.5 ; CON2.21@-159.392,-51.17 ccw(c-158.7,-50.61) -158.7,-51.5 ; J2.5@-146.973,-48.179 -155.38,-48.18 -158.7,-51.5 ; -147.757,-48.18 cw(c-147.757,-48.965) J2.5@-147.203,-48.41 ; -147.757,-48.18 ccw(c-147.757,-47.396) J2.5@-147.203,-47.95 ; -147.757,-48.18 cw(c-147.757,-48.965) J2.5@-147.203,-48.41 ; -147.757,-48.18 ccw(c-147.757,-47.396) J2.5@-147.203,-47.95 ; -147.757,-48.18 cw(c-147.757,-48.965) J2.5@-147.203,-48.41 ; -147.757,-48.18 ccw(c-147.757,-47.396) J2.5@-147.203,-47.95 ; J2.5@-147.395,-48.18 cw(c-147.395,-48.603) J2.5@-147.097,-48.304 ; J2.5@-147.395,-48.18 ccw(c-147.395,-47.758) J2.5@-147.097,-48.056 ; J2.5@-147.395,-48.18 cw(c-147.395,-48.603) J2.5@-147.097,-48.304 ; J2.5@-147.395,-48.18 ccw(c-147.395,-47.758) J2.5@-147.097,-48.056 ; J2.5@-147.395,-48.18 cw(c-147.395,-48.603) J2.5@-147.097,-48.304 ; J2.5@-147.395,-48.18 ccw(c-147.395,-47.758) J2.5@-147.097,-48.056 ; -147.809,-48.18 ccw(c-147.809,-47.393) -147.253,-47.95 cw(c-147.809,-47.393) -147.809,-48.18 ; -147.806,-48.18 cw(c-147.806,-48.962) -147.253,-48.409 ccw(c-147.806,-48.962) -147.806,-48.18 ; -147.447,-48.18 ccw(c-147.447,-47.755) -147.147,-48.056 cw(c-147.447,-47.755) -147.447,-48.18 ; -147.443,-48.18 cw(c-147.443,-48.6) -147.147,-48.303 ccw(c-147.443,-48.6) -147.443,-48.18
LADDR5: CON2.22 J2.6 | length 30.5
  Top Layer w0.15: CON2.22@-161.8,-52.025 cw(c-161.8,-53.292) -160.904,-52.396 cw(c-160.008,-51.5) CON2.22@-161.275,-51.5 ; CON2.22@-161.8,-51.875 cw(c-161.8,-52.78) -161.16,-52.14 cw(c-160.52,-51.5) CON2.22@-161.425,-51.5 ; CON2.22@-161.8,-51.5 -160.8,-52.5 -158.7,-52.5 -155,-48.8 -147.286,-48.8 -147.282,-48.804 -147.232,-48.804 ; -147.232,-48.805 -146.328,-48.805 J2.6@-145.703,-48.179 ; -146.258,-48.735 cw(c-145.703,-49.29) J2.6@-145.703,-48.505 ; -146.258,-48.735 ccw(c-146.812,-48.18) J2.6@-146.028,-48.18 ; -146.258,-48.735 cw(c-145.703,-49.29) J2.6@-145.703,-48.505 ; -146.258,-48.735 ccw(c-146.812,-48.18) J2.6@-146.028,-48.18 ; -146.258,-48.735 cw(c-145.703,-49.29) J2.6@-145.703,-48.505 ; -146.258,-48.735 ccw(c-146.812,-48.18) J2.6@-146.028,-48.18 ; J2.6@-146.002,-48.479 cw(c-145.703,-48.778) J2.6@-145.703,-48.355 ; J2.6@-146.002,-48.479 ccw(c-146.3,-48.18) J2.6@-145.878,-48.18 ; J2.6@-146.002,-48.479 cw(c-145.703,-48.778) J2.6@-145.703,-48.355 ; J2.6@-146.002,-48.479 ccw(c-146.3,-48.18) J2.6@-145.878,-48.18 ; J2.6@-146.002,-48.479 cw(c-145.703,-48.778) J2.6@-145.703,-48.355 ; J2.6@-146.002,-48.479 ccw(c-146.3,-48.18) J2.6@-145.878,-48.18 ; -146.302,-48.78 ccw(c-146.848,-48.234) -146.077,-48.196 cw(c-146.848,-48.234) -146.302,-48.78 ; -146.221,-48.698 cw(c-145.753,-49.166) -145.753,-48.504 ccw(c-145.753,-49.166) -146.221,-48.698 ; -146.063,-48.541 ccw(c-146.393,-48.211) -145.928,-48.188 cw(c-146.393,-48.211) -146.063,-48.541
LADDR6: CON2.11 J2.16 | length 28.5
  Top Layer w0.15: CON2.11@-159.8,-61.5 -158.7,-61.5 ; CON2.11@-159.508,-61.736 cw(c-159.014,-62.136) -159.014,-61.5 cw(c-159.014,-60.864) CON2.11@-159.508,-61.264 ; CON2.11@-159.392,-61.83 cw(c-158.7,-62.39) -158.7,-61.5 ; CON2.11@-159.392,-61.17 ccw(c-158.7,-60.61) -158.7,-61.5 ; J2.16@-145.703,-54.535 -146.328,-55.16 -152.36,-55.16 -158.7,-61.5 ; -146.258,-55.089 cw(c-145.703,-55.644) J2.16@-145.703,-54.86 ; -146.258,-55.089 ccw(c-146.812,-54.535) J2.16@-146.028,-54.535 ; -146.258,-55.089 cw(c-145.703,-55.644) J2.16@-145.703,-54.86 ; -146.258,-55.089 ccw(c-146.812,-54.535) J2.16@-146.028,-54.535 ; -146.258,-55.089 cw(c-145.703,-55.644) J2.16@-145.703,-54.86 ; -146.258,-55.089 ccw(c-146.812,-54.535) J2.16@-146.028,-54.535 ; J2.16@-146.002,-54.833 cw(c-145.703,-55.132) J2.16@-145.703,-54.71 ; J2.16@-146.002,-54.833 ccw(c-146.3,-54.535) J2.16@-145.878,-54.535 ; J2.16@-146.002,-54.833 cw(c-145.703,-55.132) J2.16@-145.703,-54.71 ; J2.16@-146.002,-54.833 ccw(c-146.3,-54.535) J2.16@-145.878,-54.535 ; J2.16@-146.002,-54.833 cw(c-145.703,-55.132) J2.16@-145.703,-54.71 ; J2.16@-146.002,-54.833 ccw(c-146.3,-54.535) J2.16@-145.878,-54.535 ; -146.3,-55.132 ccw(c-146.841,-54.591) -146.077,-54.548 cw(c-146.841,-54.591) -146.3,-55.132 ; -146.213,-55.045 cw(c-145.753,-55.506) -145.753,-54.854 ccw(c-145.753,-55.506) -146.213,-55.045 ; -146.063,-54.895 ccw(c-146.393,-54.566) -145.928,-54.539 cw(c-146.393,-54.566) -146.063,-54.895
LADDR7: CON2.13 J2.13 | length 28
  Top Layer w0.15: CON2.13@-159.8,-59.5 -158.6,-59.5 ; CON2.13@-159.525,-59.754 cw(c-158.943,-60.292) -158.943,-59.5 cw(c-158.943,-58.708) CON2.13@-159.525,-59.245 ; CON2.13@-159.414,-59.856 cw(c-158.6,-60.609) -158.6,-59.5 ; CON2.13@-159.414,-59.144 ccw(c-158.6,-58.391) -158.6,-59.5 ; J2.13@-146.973,-53.264 -152.364,-53.264 -158.6,-59.5 ; -147.757,-53.264 cw(c-147.757,-54.048) J2.13@-147.203,-53.493 ; -147.757,-53.264 ccw(c-147.757,-52.479) J2.13@-147.203,-53.034 ; -147.757,-53.264 cw(c-147.757,-54.048) J2.13@-147.203,-53.493 ; -147.757,-53.264 ccw(c-147.757,-52.479) J2.13@-147.203,-53.034 ; -147.757,-53.264 cw(c-147.757,-54.048) J2.13@-147.203,-53.493 ; -147.757,-53.264 ccw(c-147.757,-52.479) J2.13@-147.203,-53.034 ; J2.13@-147.395,-53.264 cw(c-147.395,-53.686) J2.13@-147.097,-53.387 ; J2.13@-147.395,-53.264 ccw(c-147.395,-52.841) J2.13@-147.097,-53.14 ; J2.13@-147.395,-53.264 cw(c-147.395,-53.686) J2.13@-147.097,-53.387 ; J2.13@-147.395,-53.264 ccw(c-147.395,-52.841) J2.13@-147.097,-53.14 ; J2.13@-147.395,-53.264 cw(c-147.395,-53.686) J2.13@-147.097,-53.387 ; J2.13@-147.395,-53.264 ccw(c-147.395,-52.841) J2.13@-147.097,-53.14 ; -147.818,-53.264 ccw(c-147.818,-52.464) -147.253,-53.03 cw(c-147.818,-52.464) -147.818,-53.264 ; -147.797,-53.264 cw(c-147.797,-54.034) -147.253,-53.489 ccw(c-147.797,-54.034) -147.797,-53.264 ; -147.456,-53.264 ccw(c-147.456,-52.827) -147.147,-53.136 cw(c-147.456,-52.827) -147.456,-53.264 ; -147.435,-53.264 cw(c-147.435,-53.672) -147.147,-53.383 ccw(c-147.435,-53.672) -147.435,-53.264
LADDR8: CON2.14 J2.14 | length 31.8
  Top Layer w0.15: CON2.14@-161.8,-60.025 cw(c-161.8,-61.292) -160.904,-60.396 cw(c-160.008,-59.5) CON2.14@-161.275,-59.5 ; CON2.14@-161.8,-59.875 cw(c-161.8,-60.78) -161.16,-60.14 cw(c-160.52,-59.5) CON2.14@-161.425,-59.5 ; CON2.14@-161.8,-59.5 -160.8,-60.5 -158.6,-60.5 -152,-53.9 -148.3,-53.9 -146.339,-53.9 J2.14@-145.703,-53.264 ; -146.258,-53.818 cw(c-145.703,-54.373) J2.14@-145.703,-53.589 ; -146.258,-53.818 ccw(c-146.812,-53.264) J2.14@-146.028,-53.264 ; -146.258,-53.818 cw(c-145.703,-54.373) J2.14@-145.703,-53.589 ; -146.258,-53.818 ccw(c-146.812,-53.264) J2.14@-146.028,-53.264 ; -146.258,-53.818 cw(c-145.703,-54.373) J2.14@-145.703,-53.589 ; -146.258,-53.818 ccw(c-146.812,-53.264) J2.14@-146.028,-53.264 ; J2.14@-146.002,-53.562 cw(c-145.703,-53.861) J2.14@-145.703,-53.439 ; J2.14@-146.002,-53.562 ccw(c-146.3,-53.264) J2.14@-145.878,-53.264 ; J2.14@-146.002,-53.562 cw(c-145.703,-53.861) J2.14@-145.703,-53.439 ; J2.14@-146.002,-53.562 ccw(c-146.3,-53.264) J2.14@-145.878,-53.264 ; J2.14@-146.002,-53.562 cw(c-145.703,-53.861) J2.14@-145.703,-53.439 ; J2.14@-146.002,-53.562 ccw(c-146.3,-53.264) J2.14@-145.878,-53.264 ; -146.312,-53.873 ccw(c-146.88,-53.305) -146.078,-53.273 cw(c-146.88,-53.305) -146.312,-53.873 ; -146.215,-53.776 cw(c-145.753,-54.238) -145.753,-53.584 ccw(c-145.753,-54.238) -146.215,-53.776 ; -146.07,-53.631 ccw(c-146.414,-53.286) -145.928,-53.267 cw(c-146.414,-53.286) -146.07,-53.631
LADDR9: CON2.15 J2.11 | length 28
  Top Layer w0.15: CON2.15@-159.8,-57.5 -158.5,-57.5 -152.993,-51.993 J2.11@-146.973,-51.993 ; CON2.15@-159.535,-57.765 cw(c-158.895,-58.405) -158.895,-57.5 cw(c-158.895,-56.595) CON2.15@-159.535,-57.235 ; CON2.15@-159.429,-57.871 cw(c-158.533,-58.767) -158.533,-57.5 cw(c-158.533,-56.233) CON2.15@-159.429,-57.129 ; -147.757,-51.993 cw(c-147.757,-52.777) J2.11@-147.203,-52.223 ; -147.757,-51.993 ccw(c-147.757,-51.208) J2.11@-147.203,-51.763 ; -147.757,-51.993 cw(c-147.757,-52.777) J2.11@-147.203,-52.223 ; -147.757,-51.993 ccw(c-147.757,-51.208) J2.11@-147.203,-51.763 ; -147.757,-51.993 cw(c-147.757,-52.777) J2.11@-147.203,-52.223 ; -147.757,-51.993 ccw(c-147.757,-51.208) J2.11@-147.203,-51.763 ; J2.11@-147.395,-51.993 cw(c-147.395,-52.415) J2.11@-147.097,-52.117 ; J2.11@-147.395,-51.993 ccw(c-147.395,-51.57) J2.11@-147.097,-51.869 ; J2.11@-147.395,-51.993 cw(c-147.395,-52.415) J2.11@-147.097,-52.117 ; J2.11@-147.395,-51.993 ccw(c-147.395,-51.57) J2.11@-147.097,-51.869 ; J2.11@-147.395,-51.993 cw(c-147.395,-52.415) J2.11@-147.097,-52.117 ; J2.11@-147.395,-51.993 ccw(c-147.395,-51.57) J2.11@-147.097,-51.869 ; -147.816,-51.993 ccw(c-147.816,-51.197) -147.253,-51.76 cw(c-147.816,-51.197) -147.816,-51.993 ; -147.799,-51.993 cw(c-147.799,-52.766) -147.253,-52.219 ccw(c-147.799,-52.766) -147.799,-51.993 ; -147.454,-51.993 ccw(c-147.454,-51.559) -147.147,-51.866 cw(c-147.454,-51.559) -147.454,-51.993 ; -147.437,-51.993 cw(c-147.437,-52.404) -147.147,-52.113 ccw(c-147.437,-52.404) -147.437,-51.993
LADDR10: CON2.16 J2.12 | length 31.6
  Top Layer w0.15: CON2.16@-161.8,-58.025 cw(c-161.8,-59.051) -161.074,-58.326 ; CON2.16@-161.8,-57.875 cw(c-161.8,-58.539) -161.331,-58.069 ; CON2.16@-161.8,-57.6 -160.9,-58.5 -158.6,-58.5 -152.718,-52.618 -146.328,-52.618 J2.12@-145.703,-51.993 ; CON2.16@-161.576,-57.52 ccw(c-160.981,-57.574) -161.403,-57.997 ; CON2.16@-161.427,-57.534 ccw(c-160.565,-57.612) -161.177,-58.223 ; CON2.16@-161.277,-57.547 ccw(c-160.149,-57.649) -160.95,-58.45 ; -146.258,-52.548 cw(c-145.703,-53.102) J2.12@-145.703,-52.318 ; -146.258,-52.548 ccw(c-146.812,-51.993) J2.12@-146.028,-51.993 ; -146.258,-52.548 cw(c-145.703,-53.102) J2.12@-145.703,-52.318 ; -146.258,-52.548 ccw(c-146.812,-51.993) J2.12@-146.028,-51.993 ; -146.258,-52.548 cw(c-145.703,-53.102) J2.12@-145.703,-52.318 ; -146.258,-52.548 ccw(c-146.812,-51.993) J2.12@-146.028,-51.993 ; J2.12@-146.002,-52.292 cw(c-145.703,-52.59) J2.12@-145.703,-52.168 ; J2.12@-146.002,-52.292 ccw(c-146.3,-51.993) J2.12@-145.878,-51.993 ; J2.12@-146.002,-52.292 cw(c-145.703,-52.59) J2.12@-145.703,-52.168 ; J2.12@-146.002,-52.292 ccw(c-146.3,-51.993) J2.12@-145.878,-51.993 ; J2.12@-146.002,-52.292 cw(c-145.703,-52.59) J2.12@-145.703,-52.168 ; J2.12@-146.002,-52.292 ccw(c-146.3,-51.993) J2.12@-145.878,-51.993 ; -146.301,-52.591 ccw(c-146.844,-52.048) -146.077,-52.007 cw(c-146.844,-52.048) -146.301,-52.591 ; -146.216,-52.506 cw(c-145.753,-52.97) -145.753,-52.314 ccw(c-145.753,-52.97) -146.216,-52.506 ; -146.063,-52.353 ccw(c-146.393,-52.024) -145.928,-51.999 cw(c-146.393,-52.024) -146.063,-52.353
LADDR11: CON2.17 J2.9 | length 27.7
  Top Layer w0.15: CON2.17@-159.8,-55.5 -158.4,-55.5 -153.622,-50.722 J2.9@-146.973,-50.722 ; CON2.17@-159.535,-55.765 cw(c-158.895,-56.405) -158.895,-55.5 cw(c-158.895,-54.595) CON2.17@-159.535,-55.235 ; CON2.17@-159.429,-55.871 cw(c-158.533,-56.767) -158.533,-55.5 cw(c-158.533,-54.233) CON2.17@-159.429,-55.129 ; -147.757,-50.722 cw(c-147.757,-51.507) J2.9@-147.203,-50.952 ; -147.757,-50.722 ccw(c-147.757,-49.937) J2.9@-147.203,-50.492 ; -147.757,-50.722 cw(c-147.757,-51.507) J2.9@-147.203,-50.952 ; -147.757,-50.722 ccw(c-147.757,-49.937) J2.9@-147.203,-50.492 ; -147.757,-50.722 cw(c-147.757,-51.507) J2.9@-147.203,-50.952 ; -147.757,-50.722 ccw(c-147.757,-49.937) J2.9@-147.203,-50.492 ; J2.9@-147.395,-50.722 cw(c-147.395,-51.144) J2.9@-147.097,-50.846 ; J2.9@-147.395,-50.722 ccw(c-147.395,-50.299) J2.9@-147.097,-50.598 ; J2.9@-147.395,-50.722 cw(c-147.395,-51.144) J2.9@-147.097,-50.846 ; J2.9@-147.395,-50.722 ccw(c-147.395,-50.299) J2.9@-147.097,-50.598 ; J2.9@-147.395,-50.722 cw(c-147.395,-51.144) J2.9@-147.097,-50.846 ; J2.9@-147.395,-50.722 ccw(c-147.395,-50.299) J2.9@-147.097,-50.598 ; -147.814,-50.722 ccw(c-147.814,-49.929) -147.253,-50.49 cw(c-147.814,-49.929) -147.814,-50.722 ; -147.801,-50.722 cw(c-147.801,-51.498) -147.253,-50.949 ccw(c-147.801,-51.498) -147.801,-50.722 ; -147.451,-50.722 ccw(c-147.451,-50.291) -147.147,-50.596 cw(c-147.451,-50.291) -147.451,-50.722 ; -147.439,-50.722 cw(c-147.439,-51.136) -147.147,-50.843 ccw(c-147.439,-51.136) -147.439,-50.722
LADDR24: CON2.18 J2.10 | length 31
  Top Layer w0.15: CON2.18@-161.8,-56.025 cw(c-161.8,-57.292) -160.904,-56.396 cw(c-160.008,-55.5) CON2.18@-161.275,-55.5 ; CON2.18@-161.8,-55.875 cw(c-161.8,-56.78) -161.16,-56.14 cw(c-160.52,-55.5) CON2.18@-161.425,-55.5 ; CON2.18@-161.7,-55.6 -160.8,-56.5 -158.4,-56.5 -153.247,-51.347 -146.328,-51.347 J2.10@-145.703,-50.722 ; -146.258,-51.277 cw(c-145.703,-51.832) J2.10@-145.703,-51.047 ; -146.258,-51.277 ccw(c-146.812,-50.722) J2.10@-146.028,-50.722 ; -146.258,-51.277 cw(c-145.703,-51.832) J2.10@-145.703,-51.047 ; -146.258,-51.277 ccw(c-146.812,-50.722) J2.10@-146.028,-50.722 ; -146.258,-51.277 cw(c-145.703,-51.832) J2.10@-145.703,-51.047 ; -146.258,-51.277 ccw(c-146.812,-50.722) J2.10@-146.028,-50.722 ; J2.10@-146.002,-51.021 cw(c-145.703,-51.319) J2.10@-145.703,-50.897 ; J2.10@-146.002,-51.021 ccw(c-146.3,-50.722) J2.10@-145.878,-50.722 ; J2.10@-146.002,-51.021 cw(c-145.703,-51.319) J2.10@-145.703,-50.897 ; J2.10@-146.002,-51.021 ccw(c-146.3,-50.722) J2.10@-145.878,-50.722 ; J2.10@-146.002,-51.021 cw(c-145.703,-51.319) J2.10@-145.703,-50.897 ; J2.10@-146.002,-51.021 ccw(c-146.3,-50.722) J2.10@-145.878,-50.722 ; -146.302,-51.321 ccw(c-146.845,-50.777) -146.077,-50.736 cw(c-146.845,-50.777) -146.302,-51.321 ; -146.218,-51.237 cw(c-145.753,-51.702) -145.753,-51.044 ccw(c-145.753,-51.702) -146.218,-51.237 ; -146.063,-51.082 ccw(c-146.393,-50.753) -145.928,-50.729 cw(c-146.393,-50.753) -146.063,-51.082